# Altium PCB Thermal_PCB.PcbDoc
Units mil, origin at the board's own origin, x right, y up, seen from the top; angles counter-clockwise.
Board outline 6000 x 4000 mil, 2 copper layers (Top Layer, Bottom Layer); 56 components, 49 nets, 240 pads, 68 vias.
Unrouted connection lines stored in the file: 4.
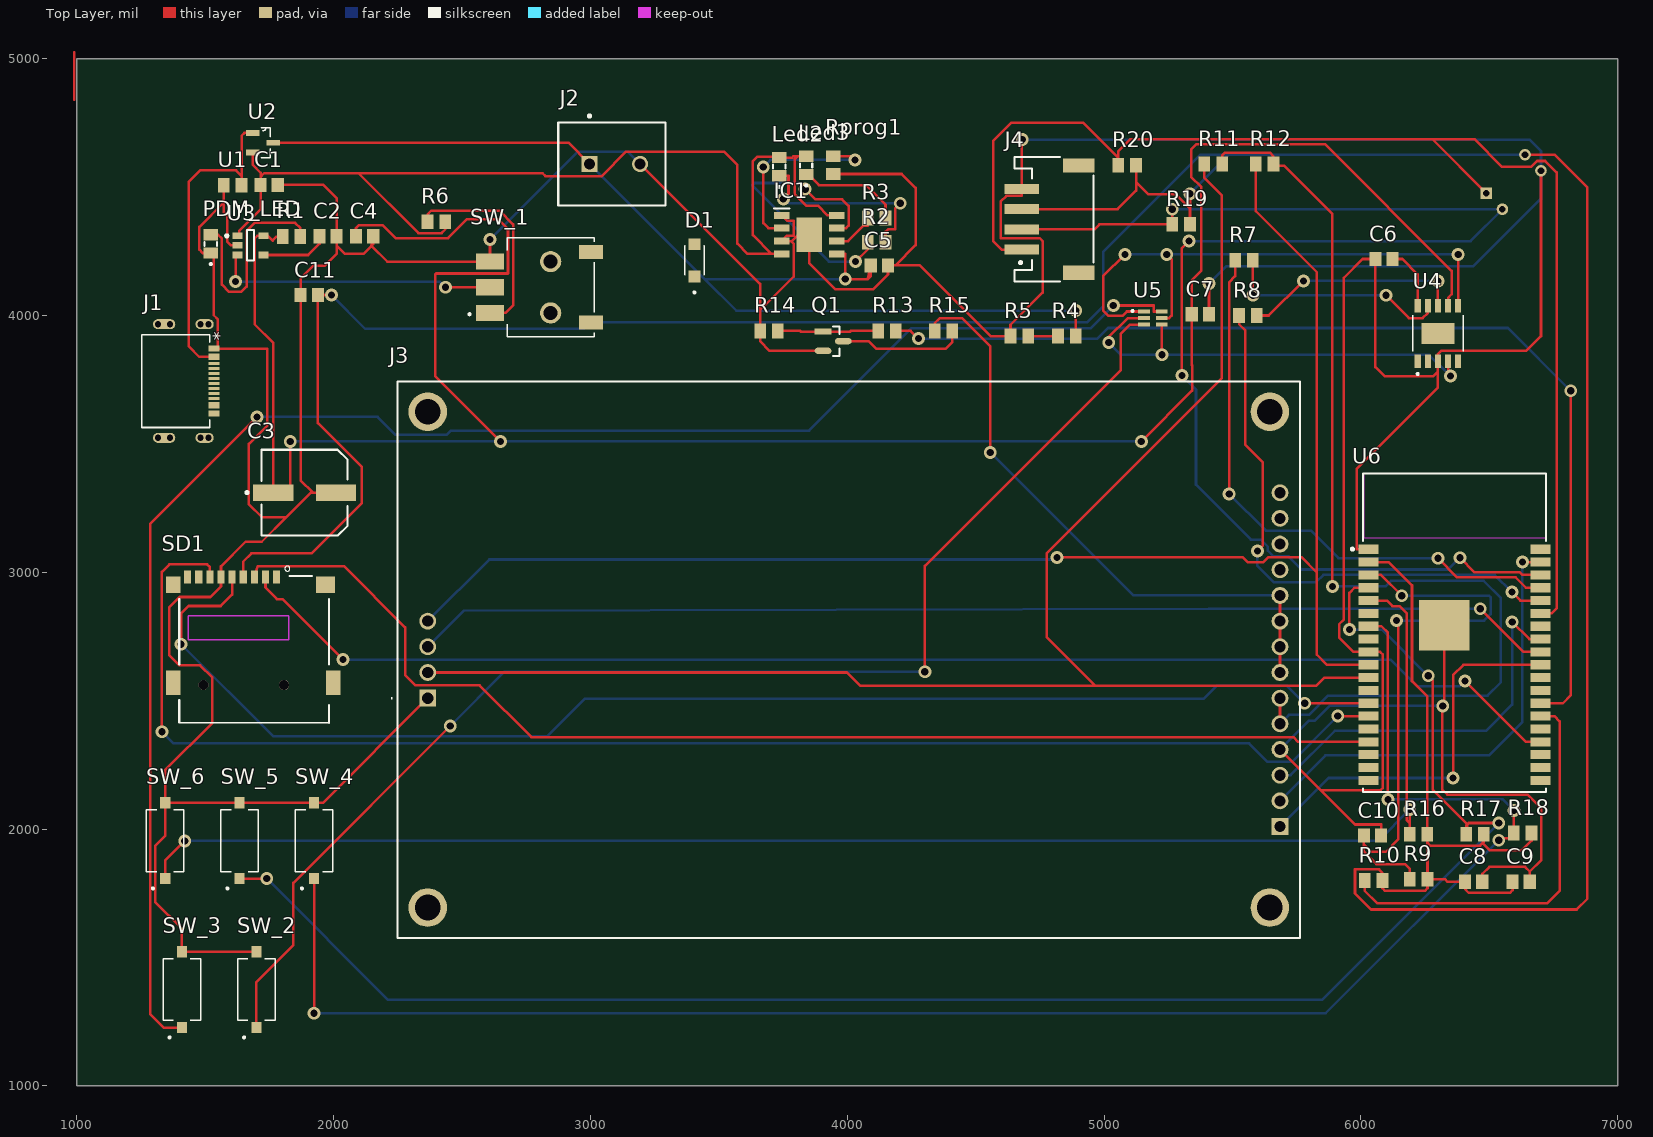
[diagram p0: Top Layer view]
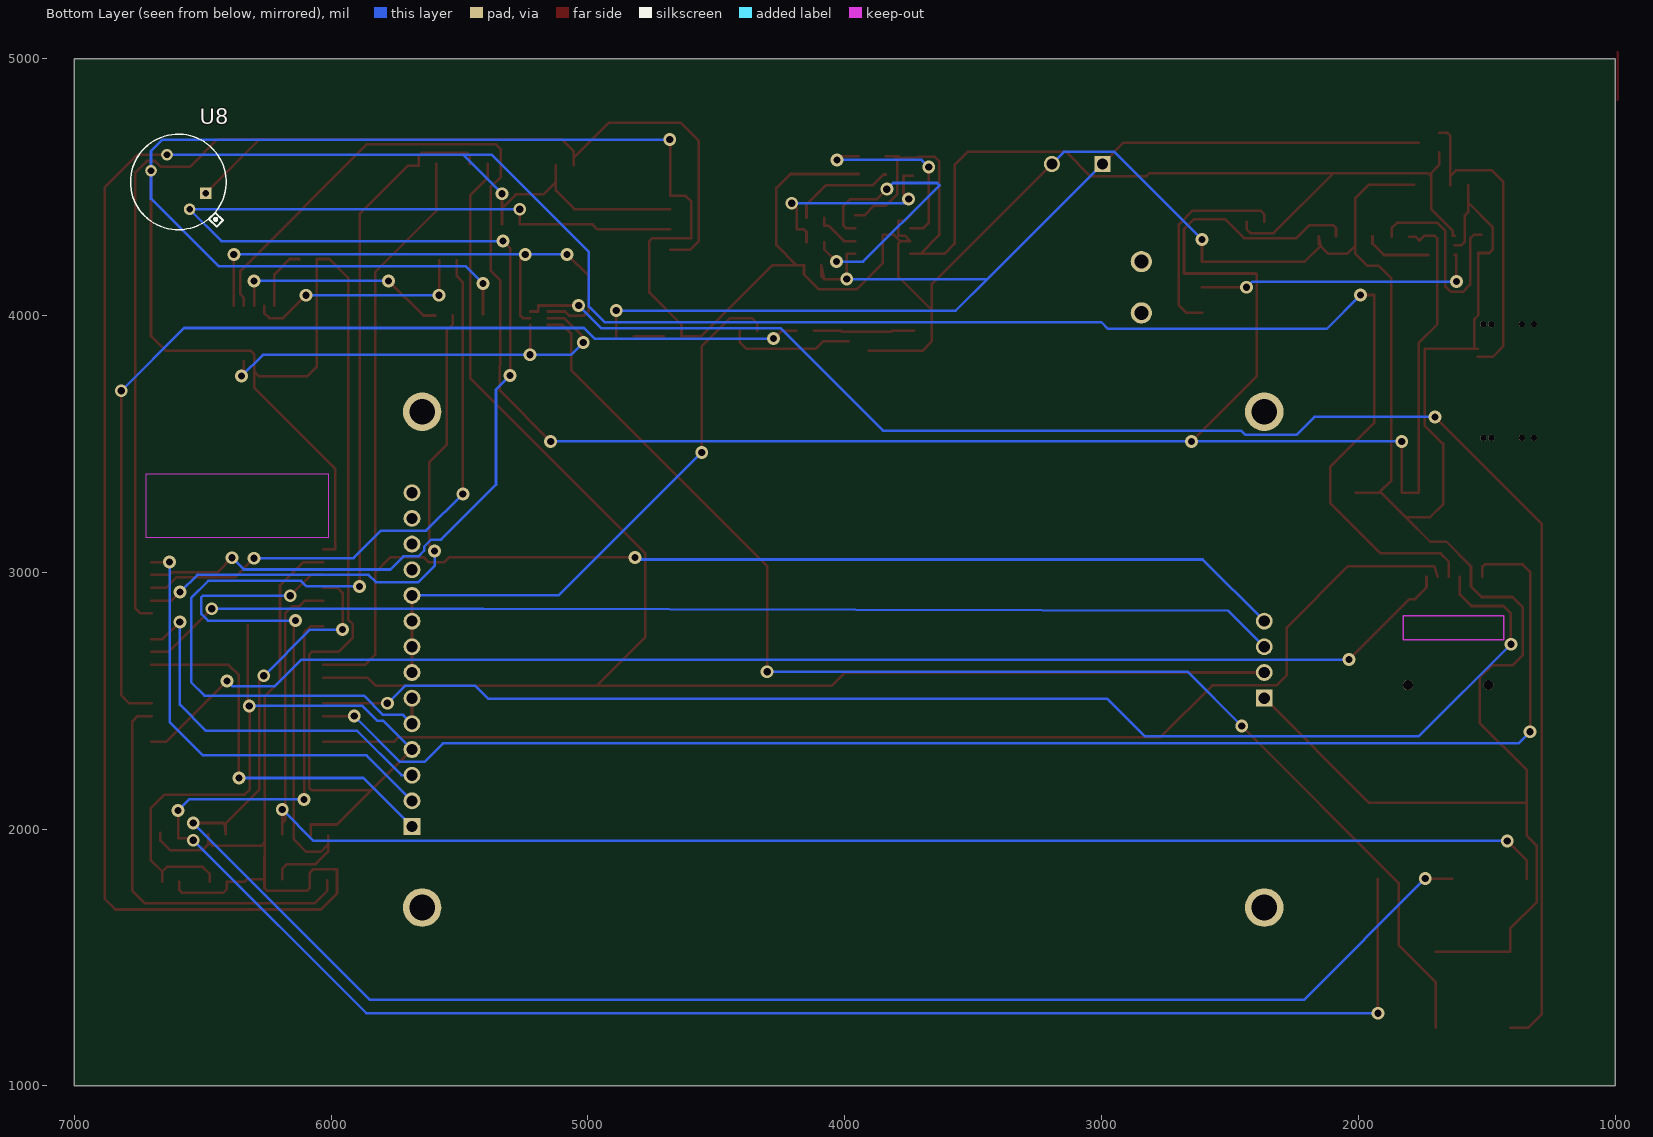
[diagram p1: Bottom Layer view, seen from below]

## Layer stack, top to bottom
Top Solder: solder mask 0.4, Solder Resist, Dk 3.5
Top Layer: signal copper 1.4
Dielectric 1: dielectric 12.6, FR-4, Dk 4.8
Bottom Layer: signal copper 1.4
Bottom Solder: solder mask 0.4, Solder Resist, Dk 3.5

## Board outline
1000,1000 7000,1000 7000,5000 1000,5000

## Design rules (kind name [scope] priority, off if disabled: settings)
Clearance [All] p1: gap=10 ignorepadtopadclearanceinfootprint=FALSE
PolygonConnect [All] p1: connectstyle=Relief reliefconductorwidth=10 reliefentries=4 polygonreliefangle="90 Angle" airgapwidth=10
RoutingVias [All] p1: holewidth=28 width=50 viastyle="Through Hole" minholewidth=28 minwidth=50 maxholewidth=28 maxwidth=50
SolderMaskExpansion [All] p1: expansion=4 istentingtop=FALSE
SupplyNets "Schematic Supply Nets_6" [InNet('+3v3')] p1: voltage=0.000
SupplyNets "Schematic Supply Nets_5" [InNet('GND')] p2: voltage=0.000
SupplyNets "Schematic Supply Nets_4" [InNet('3.3V')] p3: voltage=0.000
SupplyNets "Schematic Supply Nets_3" [InNet('+BATT')] p4: voltage=0.000
SupplyNets "Schematic Supply Nets_2" [InNet('+5V')] p5: voltage=0.000
SupplyNets "Schematic Supply Nets_1" [InNet('+3.3v')] p6: voltage=0.000
SupplyNets "Schematic Supply Nets" [InNet('VBUS')] p7: voltage=0.000
Width [All] p1: maxlimit=10 minlimit=10 preferedwidth=10
30 further rules are at their usual default settings.

## Classes and differential pairs
component class usb_program_circuit: C6 C7 R7 R8 U4 U5
component class USB_input_and_Power: C1 D1 J1 U1 U2
component class tft_display: J3 R11 R12
component class sd_card: C11 SD1
component class On_Off_switch: R6 SW_1
component class navigatie_switches: R16 R17 R18 SW_4 SW_5 SW_6
component class imagesensor: U8
component class esp32: C8 C9 C10 R9 R10 SW_2 SW_3 U6
component class ecternal_i2c: J4 R19 R20
component class batterij_voltage_sensor: R4 R5
component class batterij_charging: C5 IC1 J2 Led2 Led3 R2 R3 Rprog1
component class backlight_control: Q1 R13 R14 R15
component class 3.3V_Regulator: C2 C3 C4 PDM_LED R1 U3

## Components (designator, comment, footprint, x,y, rotation, side; value= is the part's Value field where it differs from the comment)
C1 "10u" CAPC2013X70X45NL10T25 1749.06,4508.44 r0 top
C2 "470pF" CAPC2013X70X45NL10T25 1978.27,4308.44 r0 top
C3 "2.2uF" "Elco capacitor" 1887.05,3310 r0 top
C4 "10U" CAPC2013X70X45NL10T25 2120.44,4308.44 r0 top
C5 "10uF" CAPC2013X70X45NL10T25 4125,4195 r0 top
C6 "0.1uf" CAPC2013X70X45NL10T25 6090,4220 r0 top
C7 "0.1UF" CAPC2013X70X45NL10T25 5375,4005 r0 top
C8 "10UF" CAPC2013X70X45NL10T25 6439,1795 r0 top
C9 "1UF" CAPC2013X70X45NL10T25 6624,1795 r0 top
C10 "0.1UF" CAPC2013X70X45NL10T25 6045,1975 r0 top
C11 "0.1UF" CAPC2013X70X45NL10T25 1905,4080 r0 top
D1 "NRVBSS34FA" NRVBSS34FA 3405,4215 r90 top
IC1 "TP4056-42-ESOP8" tp4056 3851.77,4315 r0 top
J1 "USB_C_Receptacle_USB2.0-Connector" "Type C USB Connector" 1385,3745 r270 top
J2 "Conn_01x02" "connector 2pin" 3095,4590 r0 top
J3 "ILI9341" ILI9341 2366.1,2510 r90 top
J4 "Conn_01x04" "connector 4pin" 4805,4375 r90 top
Led2 "LED" LEDC2012X70N 3735,4579.57 r90 top
Led3 "LED" LEDC2012X70N 3840,4584.57 r90 top
PDM_LED "LED" LEDC2012X70N 1521.36,4278.91 r90 top
Q1 "LGES8050" FP-SS8050-G-IPC_A 3945,3900 r0 top
R1 "470R" RESC2013X70X40NL20T20 1836.09,4307.46 r0 top
R2 "1.3K" RESC2013X70X40NL20T20 4114.45,4285 r0 top
R3 "1.3K" RESC2013X70X40NL20T20 4114.45,4380 r0 top
R4 "100k" RESC2013X70X40NL20T20 4855,3920 r0 top
R5 "100k" RESC2013X70X40NL20T20 4670,3920 r0 top
R6 "100k" RESC2013X70X40NL20T20 2400,4365 r0 top
R7 "1k" RESC2013X70X40NL20T20 5545,4215 r0 top
R8 "1k" RESC2013X70X40NL20T20 5560,4000 r0 top
R9 "10k" RESC2013X70X40NL20T20 6225,1805 r0 top
R10 "10k" RESC2013X70X40NL20T20 6049.45,1800 r0 top
R11 "10k" RESC2013X70X40NL20T20 5425,4590 r0 top
R12 "10k" RESC2013X70X40NL20T20 5625,4590 r0 top
R13 "1k" RESC2013X70X40NL20T20 4155,3940 r0 top
R14 "10k" RESC2013X70X40NL20T20 3695,3940 r0 top
R15 "10R" RESC2013X70X40NL20T20 4375,3940 r0 top
R16 "4.7k" RESC2013X70X40NL20T20 6224,1980 r0 top
R17 "4.7k" RESC2013X70X40NL20T20 6444,1980 r0 top
R18 "4.7k" RESC2013X70X40NL20T20 6630,1985 r0 top
R19 "4.7k" RESC2013X70X40NL20T20 5300,4355 r0 top
R20 "4.7k" RESC2013X70X40NL20T20 5090,4585 r0 top
Rprog1 "3.3K" RESC2013X70X40NL20T20 3945,4585.55 r90 top
SD1 "microSD_TF-01A" TF-01A 1690,2700 r0 top
SW_1 "SW_SPDT" SW_MPB06-1C00-R-SMT-TR 2845,4110 r90 top
SW_2 "SW_SPST" SW_TS09-63-25-WT-160-SMT-TR 1699,1375 r90 top
SW_3 "SW_SPST" SW_TS09-63-25-WT-160-SMT-TR 1409,1375 r90 top
SW_4 "SW_SPST" SW_TS09-63-25-WT-160-SMT-TR 1924,1955 r90 top
SW_5 "SW_SPST" SW_TS09-63-25-WT-160-SMT-TR 1634,1955 r90 top
SW_6 "SW_SPST" SW_TS09-63-25-WT-160-SMT-TR 1344,1955 r90 top
U1 "100K" RESC2013X70X40NL20T20 1606.89,4507.46 r0 top
U2 "DMG3415U-7" DMG3415U-7 1725,4673 r0 top
U3 "MIC5219-3.3YM5" FP-SOT23-5LD-PL-1-MFG 1676.27,4273.07 r0 top
U4 "ch340k-my" SOP100P600X160-11N 6300,3930 r90 top
U5 "DDC114TU-7-F-my" DDC114TU-7-F 5190,3990 r0 top
U6 "ESP32-WROVER-E" FP-ESP32-WROVER-I-MFG 6364.65,2764.8 r0 top
U8 "MLX90640" FP-MLX90640ESF-BAA-000-TU-MFG 6595,4520 r180 bottom

## Footprints (in the part's own frame and the unit in brackets; to place one, negate y for a bottom-side part, rotate by r counter-clockwise, add the part's x,y. Pads: shape width x height; smd on the part's side, far side on the other; paste and mask are expansions set on the pad)
CAPC2013X70X45NL10T25 [mm] "Chip Capacitor, 2-Leads, Body 2.00x1.25mm, IPC Medium Density"
  rect 1.2x1.4 smd: 1(-0.85,0) 2(0.85,0)
  body extent -1.05,-0.67 1.05,0.67, height 0.7
"connector 2pin" [mm] "Female Header, Pitch 5mm, 1 x 2 Position, Height 10mm"
  rect 1.6x1.6 hole 1.1: 1(-2.5,0)
  round 1.6 hole 1.1: 2(2.5,0)
  silkscreen extent -5.6,-4.1 5,4.87, body extent -5.6,-4.1 5,4.1, height 10
"connector 4pin" [mm] "2.00mm SMT Male Horizontal Shrouded Header, 4p"
  rect 1x3.4 smd: 1(-3,3.2) 2(-1,3.2) 3(1,3.2) 4(3,3.2)
  rect 1.4x3.1 smd: MP1(-5.3,-2.45) MP2(5.3,-2.45)
  silkscreen extent -6.15,-3.9 6.15,3.9, body extent -6,-3.8 6,4.8, height 5.57
DDC114TU-7-F [mm]
  rect 1.17x0.4 smd: 1(-0.87,0.65) 2(-0.87,0) 3(-0.87,-0.65) 4(0.87,-0.65) 5(0.87,0) 6(0.87,0.65)
  silkscreen extent -2.11,0.61 -1.91,0.81, body extent -1.05,-1 1.05,1, height 1.1
DMG3415U-7 [mil]
  rect 52x22 smd: 1(-40,38) 2(-40,-38) 3(40,0)
  silkscreen extent -6,-59 28,59, body extent -47,-57 47,57, height 45
"Elco capacitor" [mm]
  rect 4x1.6 smd paste+0 mask+0: 1(-3.1,0) 2(3.1,0)
  silkscreen extent -5.82,-4.25 4.25,4.25, body extent -5.35,-4.5 5.35,4.5, height 0.25
FP-ESP32-WROVER-I-MFG [mm]
  rect 2x0.9 smd paste+0 mask+0: 1(-8.5,8.26) 2(-8.5,6.99) 3(-8.5,5.72) 4(-8.5,4.45) 5(-8.5,3.18) 6(-8.5,1.91) 7(-8.5,0.64) 8(-8.5,-0.63) 9(-8.5,-1.9) 10(-8.5,-3.17) 11(-8.5,-4.44) 12(-8.5,-5.71) 13(-8.5,-6.98) 14(-8.5,-8.25) 15(-8.5,-9.52) 16(-8.5,-10.79) 17(-8.5,-12.06) 18(-8.5,-13.33) 19(-8.5,-14.6) 20(8.5,-14.6) 21(8.5,-13.33) 22(8.5,-12.06) 23(8.5,-10.79) 24(8.5,-9.52) 25(8.5,-8.25) 26(8.5,-6.98) 27(8.5,-5.71) 28(8.5,-4.44) 29(8.5,-3.17) 30(8.5,-1.9) 31(8.5,-0.63) 32(8.5,0.64) 33(8.5,1.91) 34(8.5,3.18) 35(8.5,4.45) 36(8.5,5.72) 37(8.5,6.99) 38(8.5,8.26)
  rect 5x5 smd paste+0 mask+0: 39(-1,0.76)
  Keep-Out Layer region: -9,9.4 9,9.4 9,15.7 -9,15.7
  Keep-Out Layer region: -9,9.4 9,9.4 9,15.7 -9,15.7
  silkscreen extent -10.22,-15.75 9.05,15.75, body extent -9.6,-15.85 9.6,15.85, height 0.25
FP-MLX90640ESF-BAA-000-TU-MFG [mm]
  rect 1.15x1.15 hole 0.65 paste-2539.97 mask+0: 1(2.698,-1.117)
  round 1.15 hole 0.65 paste-2539.97 mask+0: 2(-1.117,2.698) 3(-2.698,1.117) 4(1.117,-2.698)
  silkscreen extent -4.72,-4.72 4.72,4.72, body extent -4.64,-4.65 4.65,4.65, height 6
FP-SOT23-5LD-PL-1-MFG [mm]
  rect 1x0.66 smd paste+0 mask+0: 1(-1.3,0.95) 2(-1.3,0) 3(-1.3,-0.95) 4(1.3,-0.95) 5(1.3,0.95)
  silkscreen extent -2.47,-1.5 0.35,1.5, body extent -1.9,-1.6 1.9,1.6, height 0.25
FP-SS8050-G-IPC_A [mm]
  rect 1.657x0.612 smd paste+0 mask+0: 1(-1.001,0.95)
  rrect100% 1.657x0.612 smd paste+0 mask+0: 2(-1.001,-0.95) 3(1.001,0)
  silkscreen extent 0,-1.45 0.65,1.45, body extent -2.33,-1.95 2.33,1.95, height 0.25
ILI9341 [mm]
  rect 1.665x1.665 hole 1.11: A1(0,0) B1(-12.7,-84.3)
  round 1.665 hole 1.11: A2(2.54,0) A3(5.08,0) A4(7.62,0) B2(-10.16,-84.3) B3(-7.62,-84.3) B4(-5.08,-84.3) B5(-2.54,-84.3) B6(0,-84.3) B7(2.54,-84.3) B8(5.08,-84.3) B9(7.62,-84.3) B10(10.16,-84.3) B11(12.7,-84.3) B12(15.24,-84.3) B13(17.78,-84.3) B14(20.32,-84.3)
  round 3.81 hole 2.54: MH1(-20.71,0) MH2(28.33,0) MH3(-20.71,-83.3) MH4(28.33,-83.3)
  silkscreen extent -23.71,-86.3 31.33,3.6, body extent -23.71,-86.3 31.33,3, height 7.1
LEDC2012X70N [mm]
  rect 1.1x1.45 smd: A(0.9,0) C(-0.9,0)
  silkscreen extent -2.1,-0.6 0.2,0.6, body extent -1,-0.63 1,0.63, height 0.7
NRVBSS34FA [mm]
  rect 1.18x1.17 smd: A(1.59,0) C(-1.59,0)
  silkscreen extent -3.28,-0.95 1.42,0.95, body extent -1.8,-0.9 1.8,0.9, height 1.43
RESC2013X70X40NL20T20 [mm] "Chip Resistor, 2-Leads, Body 2.2x1.35mm, IPC Medium Density"
  rect 1.15x1.45 smd: 1(-0.875,0) 2(0.875,0)
  body extent -1.1,-0.72 1.1,0.72, height 0.7
SOP100P600X160-11N [mm]
  rect 2.1x3.3 smd paste-3: 0(0,0)
  rect 1.31x0.6 smd: 1(-2.75,2) 2(-2.75,1) 3(-2.75,0) 4(-2.75,-1) 5(-2.75,-2) 6(2.75,-2) 7(2.75,-1) 8(2.75,0) 9(2.75,1) 10(2.75,2)
  silkscreen extent -4.1,-2.5 1.78,2.5, body extent -3,-2.5 3,2.5, height 1.6
SW_MPB06-1C00-R-SMT-TR [mm]
  rect 1.6x2.8 smd: 1(-2.54,6) 2(0,6) 3(2.54,6)
  round 2.1 hole 1.4: P1(-2.54,0) P2(2.54,0)
  rect 1.4x2.4 smd: P3(-3.5,-4) P4(3.5,-4)
  silkscreen extent -4.9,-4.3 4.9,8.12, body extent -4.83,-8.58 4.97,7.05, height 20.51
SW_TS09-63-25-WT-160-SMT-TR [mm]
  rect 1.1x1 smd: 1(-3.75,0) 2(3.75,0)
  silkscreen extent -4.82,-1.85 3.05,1.85, body extent -4.05,-1.85 4.05,1.85, height 2.5
TF-01A [mm]
  rect 0.7x1.3 smd: 1(2.23,7.174) 2(1.13,7.174) 3(0.03,7.174) 4(-1.07,7.174) 5(-2.17,7.174) 6(-3.27,7.174) 7(-4.37,7.174) 8(-5.47,7.174) CD1(-6.57,7.174)
  rect 1.448x1.651 smd: MP1(-7.989,6.4)
  rect 1.448x2.438 smd: MP2(-7.989,-3.3) MP3(7.836,-3.3)
  rect 1.854x1.651 smd: MP4(7.061,6.4)
  round 1 hole 1 unplated: ""(-5.004,-3.531) ""(2.972,-3.531)
  Keep-Out Layer lines w0.127: -6.528,0.94 3.429,0.94 3.429,3.302 -6.528,3.302 -6.528,0.94
  silkscreen extent -7.4,-7.26 7.4,8.24
tp4056 [mm]
  rect 1.525x0.7 smd: 1(-2.712,1.905) 2(-2.712,0.635) 3(-2.712,-0.635) 4(-2.712,-1.905) 5(2.712,-1.905) 6(2.712,-0.635) 7(2.712,0.635) 8(2.712,1.905)
  rect 2.513x3.402 smd: 9(0,0)
  silkscreen extent -3.48,2.61 -1.95,2.61, body extent -3,-2.45 3,2.45, height 1.75
"Type C USB Connector" [mil]
  oval 39x87 smd: 13(-221.26,-45.23) 14(221.26,-45.23)
  oval 39x71 smd: 15(-221.26,112.25) 16(221.26,112.25)
  rect 24x43 smd: A1(-126,149.5) A4(-94.5,149.5) B1(126.01,149.5) B4(94.51,149.5)
  rect 12x43 smd: A5(-49.22,149.5) A6(-9.84,149.5) A7(9.85,149.5) A8(49.23,149.5) B5(68.92,149.5) B6(29.54,149.5) B7(-29.53,149.5) B8(-68.91,149.5)
  round 24 hole 24 unplated: ""(-221,97) ""(-221,128) ""(-221,-69) ""(-221,-22) ""(221,97) ""(221,128) ""(221,-69) ""(221,-22)
  silkscreen extent -181,-133 181,133

## Part data
C1 C2 C4 C5 C6 C7 C8 C9 C10 C11: library part C
C3: library part C_Polarized
D1: library part CMP-00278-103808874-1, "NRVBSS34FA Schottky Barrier Rectifier Diode 40V 3A 2-Pin SOD−123FL T/R", Capacitance=152pF, Forward Current=3A, Manufacturer Lifecycle Status=ACTIVE, Max Forward Surge Current (Ifsm)=80A, Max Junction Temperature (Tj)=125°C, Max Repetitive Reverse Voltage (Vrrm)=40V, Min Operating Temperature=-55°C, Peak Reverse Current=500µA, Height=1.43mm, Lifecycle Status=Production, Max Operating Temperature=125°C, NexarPartId=103808874, Reverse Voltage=40V, RoHS=Compliant
R1 R2 R3 R4 R5 R6 R7 R8 R9 R10 R11 R12 R13 R14 R15 R16 R17 R18 R19 R20 Rprog1 U1: library part CMP-2100-03671-1, "Chip Resistor, 1 KOhm, +/- 1%, 125 mW, -55 to 155 degC, 0805 (2012 Metric), RoHS, Tape and Reel", Case Code (Imperial)=0805, Case Code (Metric)=2012, Manufacturer=Yageo, Max Operating Temperature=155degC, Max Power Dissipation=125mW, Min Operating Temperature=-55degC, Package Description="2-Pin Surface Mounted Device, Body 2 x 1.25 mm", Package Quantity=1, Resistance=1KOhm, Temperature Coefficient=100ppm/degreesC, Tolerance=1%, Voltage Rating=150V, Case/Package=0805, Composition=ThickFilm, Datasheet URL=http://www.yageo.com/NewPortal/yageodocoutput?fileName=/pdf/R-Chip/PYu-RC_Group_51_RoHS_L_5.pdf, Datasheet Version="Rev. 5, 10/2016", Depth=1.25mm, Height=0.024inch, Lead Free=LeadFree, Length=0.079inch, Manufacturer URL=http://www.yageo.com/, Military Standard=Not, Number of Pins=2, Number of Terminations=2, Package Reference=0805, Packaging=TapeandReel, Power Rating=125mW, REACH SVHC=Unknown, RoHSCompliant=true, Termination=SMD/SMT, Voltage Rating (DC)=150V, Width=0.049inch

## Via types
v1: diameter 50, hole 28, Top Layer to Bottom Layer, 68 vias

## Nets (pads, with @x,y where several pads share a name; then routed paths per layer and width w, separated by ;. In a path a pad name is that pad's centre, name@x,y a point inside that pad or via, vN(x,y) a via of type N, cw(c..) or ccw(c..) an arc to the next point about the centre after c; other vN are vias at no path point)
3.3V: C8.1 C9.1 C11.2 J4.3 R9.2 R10.2 R16.2 R17.2 R18.2 R19.2 R20.2 SD1.4 U6.2 U8.2 | length 14642.4
  Top Layer w10: SD1.4 1647.87,3041.87 1680,3074 1914,3074 2110,3270 2110,3410 1938.46,3581.54 C11.2 v1(1991,4080) ; J4.3 5052.82,4414.37 5124.45,4486 5124.45,4520 ; R20.2 5124.45,4520 ; R19.2 5334.45,4417.55 ; v1(5334.45,4474.45) 5334.45,4417.55 ; U6.2 6108,3040 6199,2949 6199,2576.48 6258.45,2517.03 R16.2 6258.45,1947.55 ; C9.1 6590.54,1762.54 6580,1752 6420,1752 6405.54,1766.46 C8.1 6337,1795 6327,1805 R9.2 ; U8.2 6754.27,4626.21 6882,4498.48 6882,1729 6840,1687 6040,1687 5977,1750 5977,1843.55 6070.35,1843.55 6083.9,1830 R10.2 6083.9,1770 6093.9,1760 6249.45,1760 6259.45,1770 R9.2 ; R18.2 6664.45,1955.45 6625.97,1916.97 6502.48,1916.97 6473.95,1945.5 ; 5124.45,4520 5172.45,4472 5280,4472 5334.45,4417.55 ; 6258.45,1947.55 6258.45,1893 6259.45,1892 R9.2 ; 6258.45,1947.55 6270,1936 6464.45,1936 6473.95,1945.5 ; 6473.95,1945.5 6478.45,1950 R17.2 6473.95,1945.5
  Bottom Layer w10: v1(1991,4080) 2123,3948 2975,3948 3001,3974 4935.08,3974 4996,4034.92 4996,4247 5375.21,4626.21 5486.21,4626.21 ; v1(5334.45,4474.45) 5486.21,4626.21 ; U8.2 5486.21,4626.21
+3.3v: C3.1 C4.1 C7.1 R1.1 U3.5 U4.7 | length 9257
  Top Layer w10: R1.1 1778.1,4307.46 1762.56,4291.92 1744.01,4310.47 U3.5 1702.47,4310.47 1692,4300 1692,3966 1765,3893 C3.1 1831,3310 v1(1831,3510) ; C4.1 2086.98,4340 2098.98,4352 2190.35,4352 2241.35,4301 2446,4301 2520,4375 2640,4375 2678.9,4336.1 2678.9,4163.5 2398.5,4163.5 2395,4160 2395,3765 v1(2650,3510) ; v1(5145,3510) 5343,3708 5343,3805.68 5341.54,3807.14 C7.1 5341.54,4137.54 5378.43,4174.43 5378.43,4500.57 5339,4540 5339,4646 5360,4667 5860,4667 6353.24,4173.76 6353.24,4082.74 6339.37,4068.87 U4.7
  Bottom Layer w10: v1(1831,3510) v1(2650,3510) v1(5145,3510)
+3v3: J3.B5 J3.B6 R11.2 R12.2 | length 4085.2
  Top Layer w10: R11.2 5459.45,4623.45 5470,4634 5645.45,4634 5659.45,4620 R12.2 5659.45,4584 5700,4584 5889,4395 v1(5889,2945) ; J3.B5 J3.B6
  Bottom Layer w10: J3.B5 5720.01,2445.01 5797.72,2445.01 5872.71,2520 6493,2520 6545,2572 6545,2900 6478.32,2966.68 6117.27,2966.68 6095.59,2945 v1(5889,2945)
+5V: J1.A4 U1.2 U2.1 | length 1229.4
  Top Layer w10: J1.A4 1476.5,3839.5 1436,3880 1436,4521 1480,4565 1620,4565 1641.34,4543.66 ; U1.2 1641.34,4543.66 ; U2.1 1652.34,4711 1641.34,4700 1641.34,4543.66
+BATT: C5.1 IC1.5 J2.1 R4.2 U2.3 | length 4373.2
  Top Layer w10: U2.3 2913.57,4673 J2.1 ; IC1.5 3992,4240 v1(3992,4142) 4080,4142 ; R4.2 v1(4889.45,4019) ; 4080,4142 C5.1 4091.54,4153.54 4080,4142
  Bottom Layer w10: J2.1 3444.57,4142 ; v1(3992,4142) 3444.57,4142 ; v1(4889.45,4019) 3567.57,4019 3444.57,4142
GND: C1.2 C2.2 C3.2 C4.2 C5.2 C6.1 C7.2 C8.2 C9.2 C10.2 C11.1 IC1.1 IC1.3 IC1.9 J1.A1 J2.2 J3.A1 J3.B4 J4.4 PDM_LED.C Q1.2 R5.1 R14.1 Rprog1.1 SD1.6 SW_1.3 SW_2.2 SW_3.2 SW_4.2 SW_5.2 SW_6.2 U1.1 U3.2 U4.3 U6.1 U6.9 U6.39 U8.3 | length 25401.1
  Top Layer w10: J1.A1 J1.A1@1548,3871 ; U1.1 1572.44,4441 ; U3.2 1600,4273.07 1585,4288.07 1585,4390 1572.44,4402.56 1572.44,4441 ; SW_2.2 SW_3.2 1409,1613 1305,1717 1305,1935 1344,1974 SW_6.2 ; C1.2 1960,4508.44 2011.73,4456.71 C2.2 2011.73,4272.27 ; C3.2 1920,3310 ; J3.A1 1958.74,2102.64 SW_4.2 SW_5.2 SW_6.2 ; v1(2608.78,4295.78) SW_1.3 2208.68,4210 2147.34,4271.34 ; J2.2 3660.55,4122.87 3660.55,4020.55 ; IC1.1 3766,4369 3791,4369 3791,4311 3766,4311 IC1.3 3781,4290 ; Q1.2 3697.95,3862.6 3660.55,3900 R14.1 3660.55,4020.55 ; Rprog1.1 4211.9,4551.1 4266,4497 4266,4274 4187,4195 ; v1(4681,4685) 4679.02,4683.02 J4.4 4679.02,4466 4620,4466 4597.09,4443.09 4597.09,4300.94 4750.06,4300.94 4761,4290 4761,4089.45 4635.55,3964 R5.1 4557.86,3920 4282.86,4195 4187,4195 ; C7.2 v1(5408.46,4124.46) ; J3.B4 5843.3,2151.7 ; U6.1 5984,3090 5984,3404 6300,3720 6300,3783 ; C10.2 6078.46,2018 5977,2018 5843.3,2151.7 ; U6.39 6325.28,2486.28 v1(6319,2480) 6316,2477 6316,2155 6337,2134 6649,2134 6703,2080 6703,1880 6657.46,1834.46 ; C8.2 6472.46,1825.46 6500,1853 6638.93,1853 6657.46,1834.46 ; C9.2 6657.46,1834.46 ; U8.3 6701.21,3920 6644.21,3863 6313,3863 6300,3850 U4.3 6300,3783 ; SW_6.2 1344,2230 1528,2414 1528,2590 1480,2638 1400,2638 1359.45,2678.55 1359.45,2863.45 1400,2904 1520,2904 1561.25,2945.25 SD1.6 1561.25,3023 1657.25,3119 1720,3119 1816,3215 ; J1.A1@1548,3871 1740,3871 1742,3869 1742,3572 1670,3500 1670,3265 1720,3215 1816,3215 ; J1.A1@1548,3871 1548,3986 1533,4001 1533,4243.48 PDM_LED.C 1490,4243.48 1477,4256.48 1477,4345.56 1572.44,4441 ; 1816,3215 1911,3310 1920,3310 ; 1920,3310 1871.54,3358.46 C11.1 1871.54,4144.54 1920,4193 1964.73,4193 2011.73,4240 2011.73,4272.27 ; 2011.73,4272.27 2044,4240 2116,4240 2147.34,4271.34 ; 2147.34,4271.34 2153.91,4277.91 C4.2 2147.34,4271.34 ; 3660.55,4020.55 3791,4151 3791,4280 3781,4290 ; 3781,4290 3785,4290 3810,4315 IC1.9 3851.77,4205.23 3955,4102 4100.46,4102 4158.46,4160 C5.2 4187,4195 ; 5843.3,2151.7 6076.7,2151.7 6085,2160 6085,2680 6075,2690 U6.9 5972,2690 5915,2747 5915,2797.76 5934,2816.76 5934,4147 6007,4220 C6.1 6056.54,3799.46 6093,3763 6280,3763 6300,3783
  Bottom Layer w10: v1(2608.78,4295.78) 2950,4637 3146.43,4637 J2.2 ; v1(4681,4685) 6656.21,4685 6701.21,4640 U8.3 6701.21,4455.21 6438,4192 5476,4192 v1(5408.46,4124.46) ; J3.B4 5796.66,2421.66 5820,2421.66 5878.34,2480 v1(6319,2480)
NetC2_1: C2.1 U3.4 | length 264.2
  Top Layer w10: U3.4 1900.47,4235.67 1944.8,4280 C2.1
NetC6_2: C6.2 U4.10 | length 244.4
  Top Layer w10: C6.2 6161.26,4220 6221.26,4160 U4.10
NetC10_1: C10.1 R9.1 U6.3 | length 2281.7
  Top Layer w10: C10.1 6011.54,1940 ; U6.3 6078,2990 v1(6159,2909) ; v1(6139,2812) 6145,2806 6145,1960 6097,1912 6039.54,1912 6011.54,1940 ; R9.1 6190.55,1844 6171.01,1863.55 6060.45,1863.55 6011.54,1912.46 6011.54,1940
  Bottom Layer w10: v1(6139,2812) 6480,2812 6505,2837 6505,2903 6499,2909 v1(6159,2909)
NetIC1_2: IC1.2 Rprog1.2 | length 757.7
  Top Layer w10: v1(3673,4578) 3673,4360 3693,4340 IC1.2 ; Rprog1.2 4016,4620 v1(4030,4606)
  Bottom Layer w10: v1(3673,4578) 3701,4606 v1(4030,4606)
NetIC1_6: IC1.6 R3.1 | length 176.9
  Top Layer w10: IC1.6 4003,4290 4062,4349 4080,4349 R3.1
NetIC1_7: IC1.7 R2.1 | length 1161.1
  Top Layer w10: v1(3836,4492) 3876,4452 3980,4452 4005,4427 4005,4350 3995,4340 IC1.7 ; v1(4032,4210) 4080,4258 R2.1
  Bottom Layer w10: v1(3836,4492) 3812,4516 3640,4516 3631,4507 3928,4210 v1(4032,4210)
NetJ1_A6: J1.A6 J1.B6 U4.1
NetJ1_A7: J1.A7 J1.B7 U4.2
NetJ3_A2: J3.A2 R11.1 U6.11 | length 6119.3
  Top Layer w10: J3.A2 3999,2610 4051,2558 4966,2558 ; R11.1 5390.55,4536 5458.43,4468.13 5458.43,3756.43 4777,3075 4777,2747 4966,2558 ; U6.11 5858,2590 5826,2558 4966,2558
NetJ3_A3: J3.A3 U6.30 | length 4460.8
  Top Layer w10: v1(6465,2858) 6633,2690 U6.30
  Bottom Layer w10: J3.A3 2506.1,2850 5408,2858 v1(6465,2858)
NetJ3_A4: J3.A4 R12.1 U6.10 | length 5830.8
  Top Layer w10: v1(4817,3058) 5540.31,3058 5558.65,3039.66 5620.31,3039.66 5638.65,3058 5770,3058 5828,3000 ; R12.1 5590.55,4406.45 5828,4169 5828,3000 ; U6.10 5868,2640 5828,2680 5828,3000
  Bottom Layer w10: J3.A4 2606.1,3050 4809,3050 v1(4817,3058)
NetJ3_B1: J3.B1 U6.29 | length 1510.1
  Top Layer w10: v1(6359,2199) 6359,2600 6399,2640 U6.29
  Bottom Layer w10: J3.B1 5874,2199 v1(6359,2199)
NetJ3_B2: J3.B2 U6.37 | length 1763.9
  Top Layer w10: v1(6629,3040) U6.37
  Bottom Layer w10: J3.B2 5862,2287 6498,2287 6629,2418 v1(6629,3040)
NetJ3_B3: J3.B3 U6.31 | length 1478
  Top Layer w10: v1(6589,2807.03) 6656.03,2740 U6.31
  Bottom Layer w10: J3.B3 5725.82,2210 5898.17,2382.35 6486.35,2382.35 6589,2485 v1(6589,2807.03)
NetJ3_B7: J3.B7 J3.B8 J3.B9 J3.B10 R15.1 | length 2371.2
  Top Layer w10: R15.1 4340.55,3970 4359.55,3989 4448,3989 4557,3880 v1(4557,3467) ; J3.B7 J3.B8 J3.B9 J3.B10
  Bottom Layer w10: v1(4557,3467) 5114,2910 J3.B10
NetJ4_1: J4.1 R20.1 U6.33 U8.1 | length 5008.2
  Top Layer w10: J4.1 4601.14,4256.89 4568,4290.03 4568,4680 4639,4751 4918.55,4751 5055.55,4614 ; R20.1 5055.55,4614 ; U8.1 6277.8,4687 ; U6.33 6742,2840 6762,2860 6762,4556.85 6717.22,4601.63 6685.62,4601.63 6662.99,4579 6550,4579 6442,4687 6277.8,4687 ; 5055.55,4614 5055.55,4640 5102.55,4687 6277.8,4687
NetJ4_2: J4.2 R19.1 U6.36 U8.4 | length 5727.9
  Top Layer w10: J4.2 4962,4335.63 4981.37,4355 R19.1 v1(5265.55,4413.79) ; v1(5303,3767) 5302,3768 5302,4261 v1(5331,4290) ; v1(6386,3057) 6443,3000 6619,3000 6629,2990 U6.36
  Bottom Layer w10: v1(5265.55,4413.79) U8.4 6427.22,4290 v1(5331,4290) ; v1(5303,3767) 5358,3712 5358,3341.22 5571.94,3127.29 5609.94,3127.29 5637.22,3100 5637.22,3084.78 5660,3062 5718,3062 5769,3011 6340,3011 v1(6386,3057)
NetLed2_C: Led2.C R2.2 | length 787.7
  Top Layer w10: Led2.C 3771,4544.13 3771,4474 v1(3751,4454) ; R2.2 4148.9,4325.35 4160,4336.45 4186.54,4336.45 4186.54,4417.54 v1(4206,4437)
  Bottom Layer w10: v1(3751,4454) 3768,4437 v1(4206,4437)
NetLed3_C: Led3.C R3.2 | length 409.4
  Top Layer w10: Led3.C 3848.31,4549.13 3889.44,4508 4072.9,4508 4148.9,4432 R3.2
NetPDM_LED_A: PDM_LED.A R1.2 | length 826.5
  Top Layer w10: PDM_LED.A 1550.65,4314.35 1565,4300 1565,4120 1593,4092 1640,4092 1661,4113 1661,4330 1692,4361 1849.54,4361 1870.54,4340 R1.2
NetQ1_1: Q1.1 R13.1 R14.2 | length 393.3
  Top Layer w10: R14.2 3816,3940 3818.6,3937.4 Q1.1 4011,3937.4 4013.6,3940 R13.1
NetQ1_3: Q1.3 R15.2 | length 492.4
  Top Layer w10: Q1.3 4083,3900 4113.15,3869.85 4383.3,3869.85 4409.45,3896 R15.2
NetR4_1: R4.1 R5.2 | length 116.1
  Top Layer w10: R5.2 R4.1
NetR6_1: R6.1 SW_1.1 | length 808.3
  Top Layer w10: R6.1 2365.55,4394.1 2380,4408.55 2645.45,4408.55 2698.9,4355.1 2698.9,4039.9 2669,4010 SW_1.1
NetR7_1: R7.1 U6.35 | length 2283.2
  Top Layer w10: v1(5487,3305) 5487,4129.45 5510.55,4153 R7.1 ; v1(6300,3055) 6375,2980 6603,2980 6643,2940 U6.35
  Bottom Layer w10: v1(5487,3305) 5630,3162 5805,3162 5912,3055 v1(6300,3055)
NetR7_2: R7.2 U4.9 | length 890.2
  Top Layer w10: v1(5579.45,4079) R7.2 ; v1(6098,4079) 6187,3990 6240,3990 6260.63,4010.63 U4.9
  Bottom Layer w10: v1(5579.45,4079) v1(6098,4079)
NetR8_1: R8.1 U6.34 | length 2202.6
  Top Layer w10: R8.1 5525.55,3966 5550,3941.55 5550,3496 5617,3429 5617,3103 v1(5597,3083) ; v1(6588,2923) 6621,2890 U6.34
  Bottom Layer w10: v1(5597,3083) 5597,3025 5660,2962 5826,2962 5854,2990 6521,2990 v1(6588,2923)
NetR8_2: R8.2 U4.8 | length 858.2
  Top Layer w10: R8.2 5641,4000 v1(5776,4135) ; U4.8 v1(6300,4135)
  Bottom Layer w10: v1(5776,4135) v1(6300,4135)
NetR10_1: R10.1 U6.25 | length 1581.8
  Top Layer w10: R10.1 6015,1760 6063,1712 6726,1712 6774,1760 6774,2420 6754,2440 U6.25
NetR13_2: R13.2 U6.26 | length 4074.9
  Top Layer w10: R13.2 4247,3940 v1(4277,3910) ; U6.26 6786,2490 6817,2521 v1(6817,3707)
  Bottom Layer w10: v1(4277,3910) 4974.08,3910 5015.51,3951.43 6572.57,3951.43 v1(6817,3707)
NetR16_1: R16.1 SW_6.1 U6.5 | length 6085.6
  Top Layer w10: SW_6.1 1344,1878 v1(1420,1954) ; U6.5 6101,2890 6123,2868 6151,2868 6179,2840 6179,2033.9 6189.55,2023.34 ; R16.1 6189.55,2023.34 ; v1(6190,2076) 6189.55,2075.55 6189.55,2023.34
  Bottom Layer w10: v1(1420,1954) 6068,1954 v1(6190,2076)
NetR17_1: R17.1 SW_5.1 U6.4 | length 6837.7
  Top Layer w10: SW_5.1 v1(1739.64,1807.36) ; v1(5955,2777) 5955,2920 5975,2940 U6.4 ; v1(6262,2597) 6279,2580 6279,2154 6414.5,2018.5 ; v1(6537,2024) 6420,2024 6414.5,2018.5 ; 6414.5,2018.5 6409.55,2013.55 R17.1 6414.5,2018.5
  Bottom Layer w10: v1(1739.64,1807.36) 2212,1335 5848,1335 v1(6537,2024) ; v1(5955,2777) 6082,2777 v1(6262,2597)
NetR18_1: R18.1 SW_4.1 U6.7 | length 6829.1
  Top Layer w10: v1(1924,1283) SW_4.1 ; U6.7 6080,2790 6105,2765 v1(6105,2116) ; v1(6537,1957) 6544,1957 6552,1965 6595.55,1965 R18.1 v1(6595.55,2073)
  Bottom Layer w10: v1(1924,1283) 5863,1283 v1(6537,1957) ; v1(6105,2116) 6552.55,2116 v1(6595.55,2073)
NetSD1_2: SD1.2 U6.23 | length 5272.2
  Top Layer w10: SD1.2 1734.48,2941 1779.48,2896 1800,2896 v1(2036,2660) ; v1(6405,2577) 6642,2340 U6.23
  Bottom Layer w10: v1(2036,2660) 6115.48,2660 6219,2556.48 6384.48,2556.48 v1(6405,2577)
NetSD1_3: SD1.3 U6.16 | length 4761
  Top Layer w10: SD1.3 1705.17,3024 2040,3024 2278,2786 2278,2600 2318,2560 2568,2560 2770,2358 5737,2358 5755,2340 U6.16
NetSD1_5: SD1.5 U6.13 | length 5300.3
  Top Layer w10: v1(1406,2720) 1406,2840 1435,2869 1560,2869 1604.56,2913.56 SD1.5 ; v1(5781,2490) U6.13
  Bottom Layer w10: v1(1406,2720) 1764.97,2361.03 2831.03,2361.03 2977,2507 5387,2507 5438,2558 5713,2558 v1(5781,2490)
NetSD1_7: SD1.7 U6.14 | length 5685.3
  Top Layer w10: v1(1331,2379) 1331,3002 1360,3031 1506.94,3031 1517.94,3020 SD1.7 ; v1(5909.78,2440) U6.14
  Bottom Layer w10: v1(1331,2379) 1376,2334 5565,2334 5637,2262 5731.78,2262 v1(5909.78,2440)
NetSW_1_2: SW_1.2 U3.3 | length 1110.6
  Top Layer w10: v1(1618,4132) 1618,4235.67 U3.3 ; v1(2435,4110) SW_1.2
  Bottom Layer w10: v1(1618,4132) 2413,4132 v1(2435,4110)
NetSW_2_1: SW_2.1 U5.3 | length 5160.5
  Top Layer w10: SW_2.1 1699,1404 1843,1548 1843,1791 v1(2454,2402) ; v1(4302,2613) 4302,3025 5065,3788 5065,3929.41 5100,3964.41 U5.3
  Bottom Layer w10: v1(2454,2402) 2665,2613 v1(4302,2613)
NetSW_3_1: SW_3.1 U5.6 | length 6427
  Top Layer w10: SW_3.1 1337.64,1227.36 1285,1280 1285,3188 v1(1702,3605) ; v1(5036,4039) 5194,4039 5194,4015.59 U5.6
  Bottom Layer w10: v1(1702,3605) 2171,3605 2241,3535 2439,3535 2456,3552 3851,3552 4249,3950 4947,3950 v1(5036,4039)
NetU4_4: U4.4 U5.2 U5.4 | length 1754.3
  Top Layer w10: v1(5018,3895) 5018,3915.6 5092.4,3990 U5.2 ; U5.4 5225,3964.41 v1(5225,3847) ; U4.4 6339.37,3773.63 v1(6349,3764)
  Bottom Layer w10: v1(5018,3895) 5066,3847 v1(5225,3847) 6266,3847 v1(6349,3764)
NetU4_6: U4.6 U5.1 U5.5 | length 2214.8
  Top Layer w10: v1(5081,4238) 4996,4153 4996,4020 5017,3999 5072,3999 5088.59,4015.59 U5.1 ; U5.5 5253,3990 5263,4000 5263,4219 v1(5244,4238) ; U4.6 v1(6378.74,4238)
  Bottom Layer w10: v1(5081,4238) v1(5244,4238) v1(6378.74,4238)
VBUS: C1.1 IC1.4 IC1.8 Led2.A Led3.A R6.2 U2.2 U3.1 | length 4228.6
  Top Layer w10: U3.1 1632,4310.47 1632,4330 1715.6,4413.6 C1.1 1715.6,4540 ; U2.2 1685,4586.6 1715.6,4556 1715.6,4540 ; R6.2 2434.45,4335.45 2420,4321 2330,4321 2097,4554 ; IC1.4 3705,4240 ; Led3.A 3806,4620 ; IC1.8 3923,4390 3885.33,4427.67 3840,4427.67 3796,4471.67 3796,4610 3806,4620 ; 1715.6,4540 1729.6,4554 2097,4554 ; 2097,4554 2814,4554 2825,4543 3044,4543 3139,4638 3520,4638 3572,4586 3572,4280 3612,4240 3705,4240 ; 3705,4240 3632.36,4312.64 3632.36,4600.92 3650,4618.55 3708.81,4618.55 Led2.A 3785,4615 3790,4620 3806,4620
pads on no net: D1.A D1.C J1. J1.13 J1.14 J1.15 J1.16 J1.A5 J1.A8 J1.B1 J1.B4 J1.B5 J1.B8 J3.B11 J3.B12 J3.B13 J3.B14 J3.MH1 J3.MH2 J3.MH3 J3.MH4 J4.MP1 J4.MP2 SD1. SD1.1 SD1.8 SD1.CD1 SD1.MP1 SD1.MP2 SD1.MP3 SD1.MP4 SW_1.P1 SW_1.P2 SW_1.P3 SW_1.P4 U4.0 U4.5 U6.6 U6.8 U6.12 U6.15 U6.17 U6.18 U6.19 U6.20 U6.21 U6.22 U6.24 U6.27 U6.28 U6.32 U6.38
copper on no net: | length 185
  Top Layer w10: 990,4840 990,5025

## Text inside footprints (layer, text, board x,y; h text height)
J1: Top Overlay "*" at 1509,3937 h50 r270; Mechanical 13 "*" at 1509,3937 h50 r270